# Altium PCB AmplificadorNMOS.PcbDoc
Units mm, origin at the board's own origin, x right, y up, seen from the top; angles counter-clockwise.
Board outline 100 x 100 mm, 2 copper layers (Top Layer, Bottom Layer); 21 components, 9 nets, 40 pads, 0 vias.
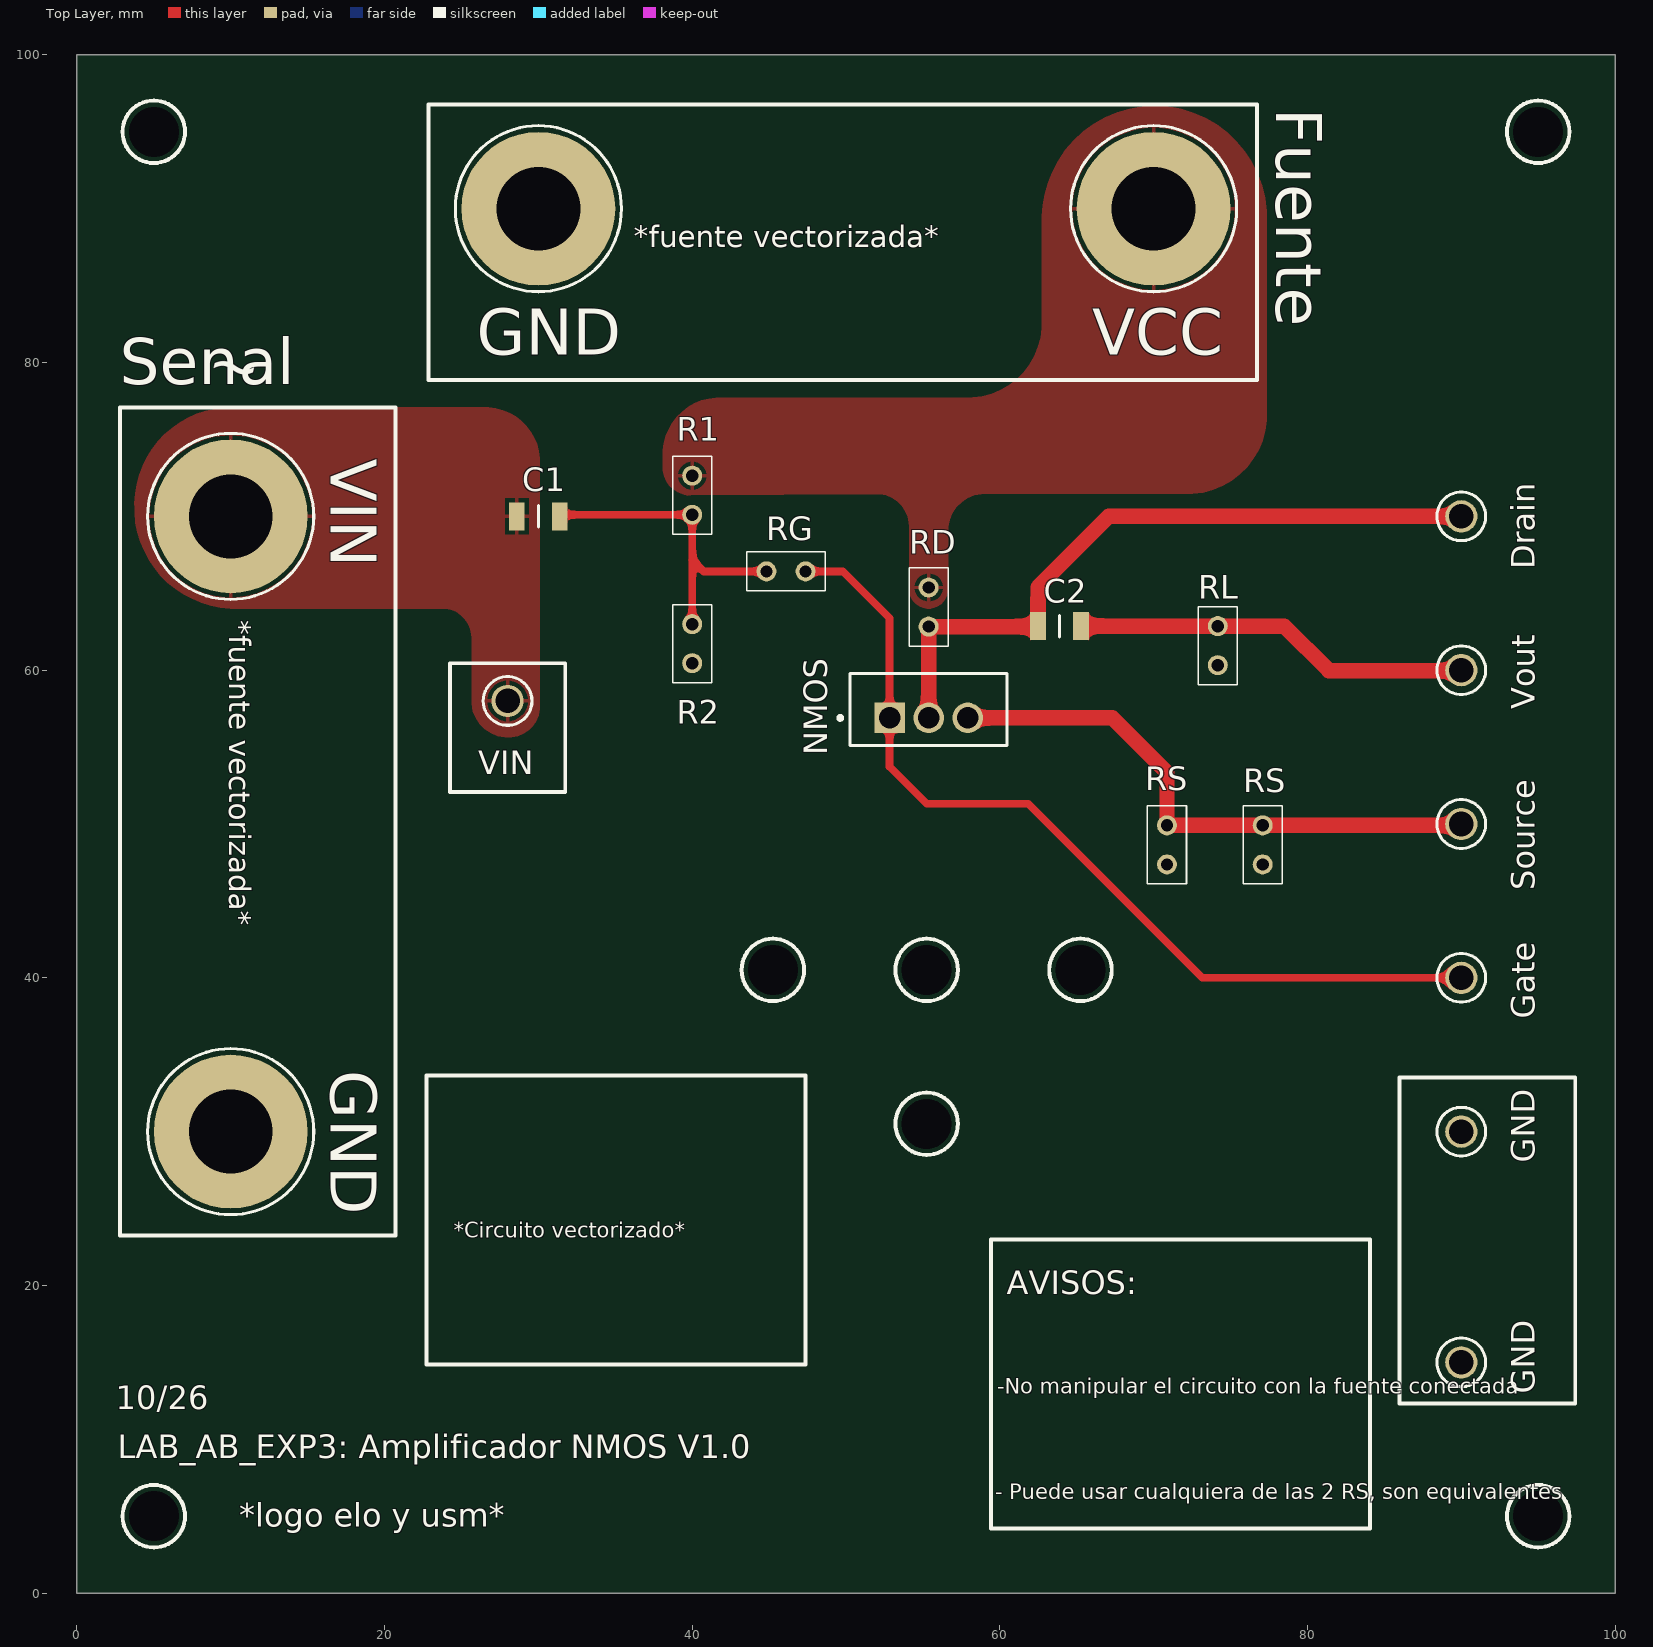
[diagram p0: Top Layer view]
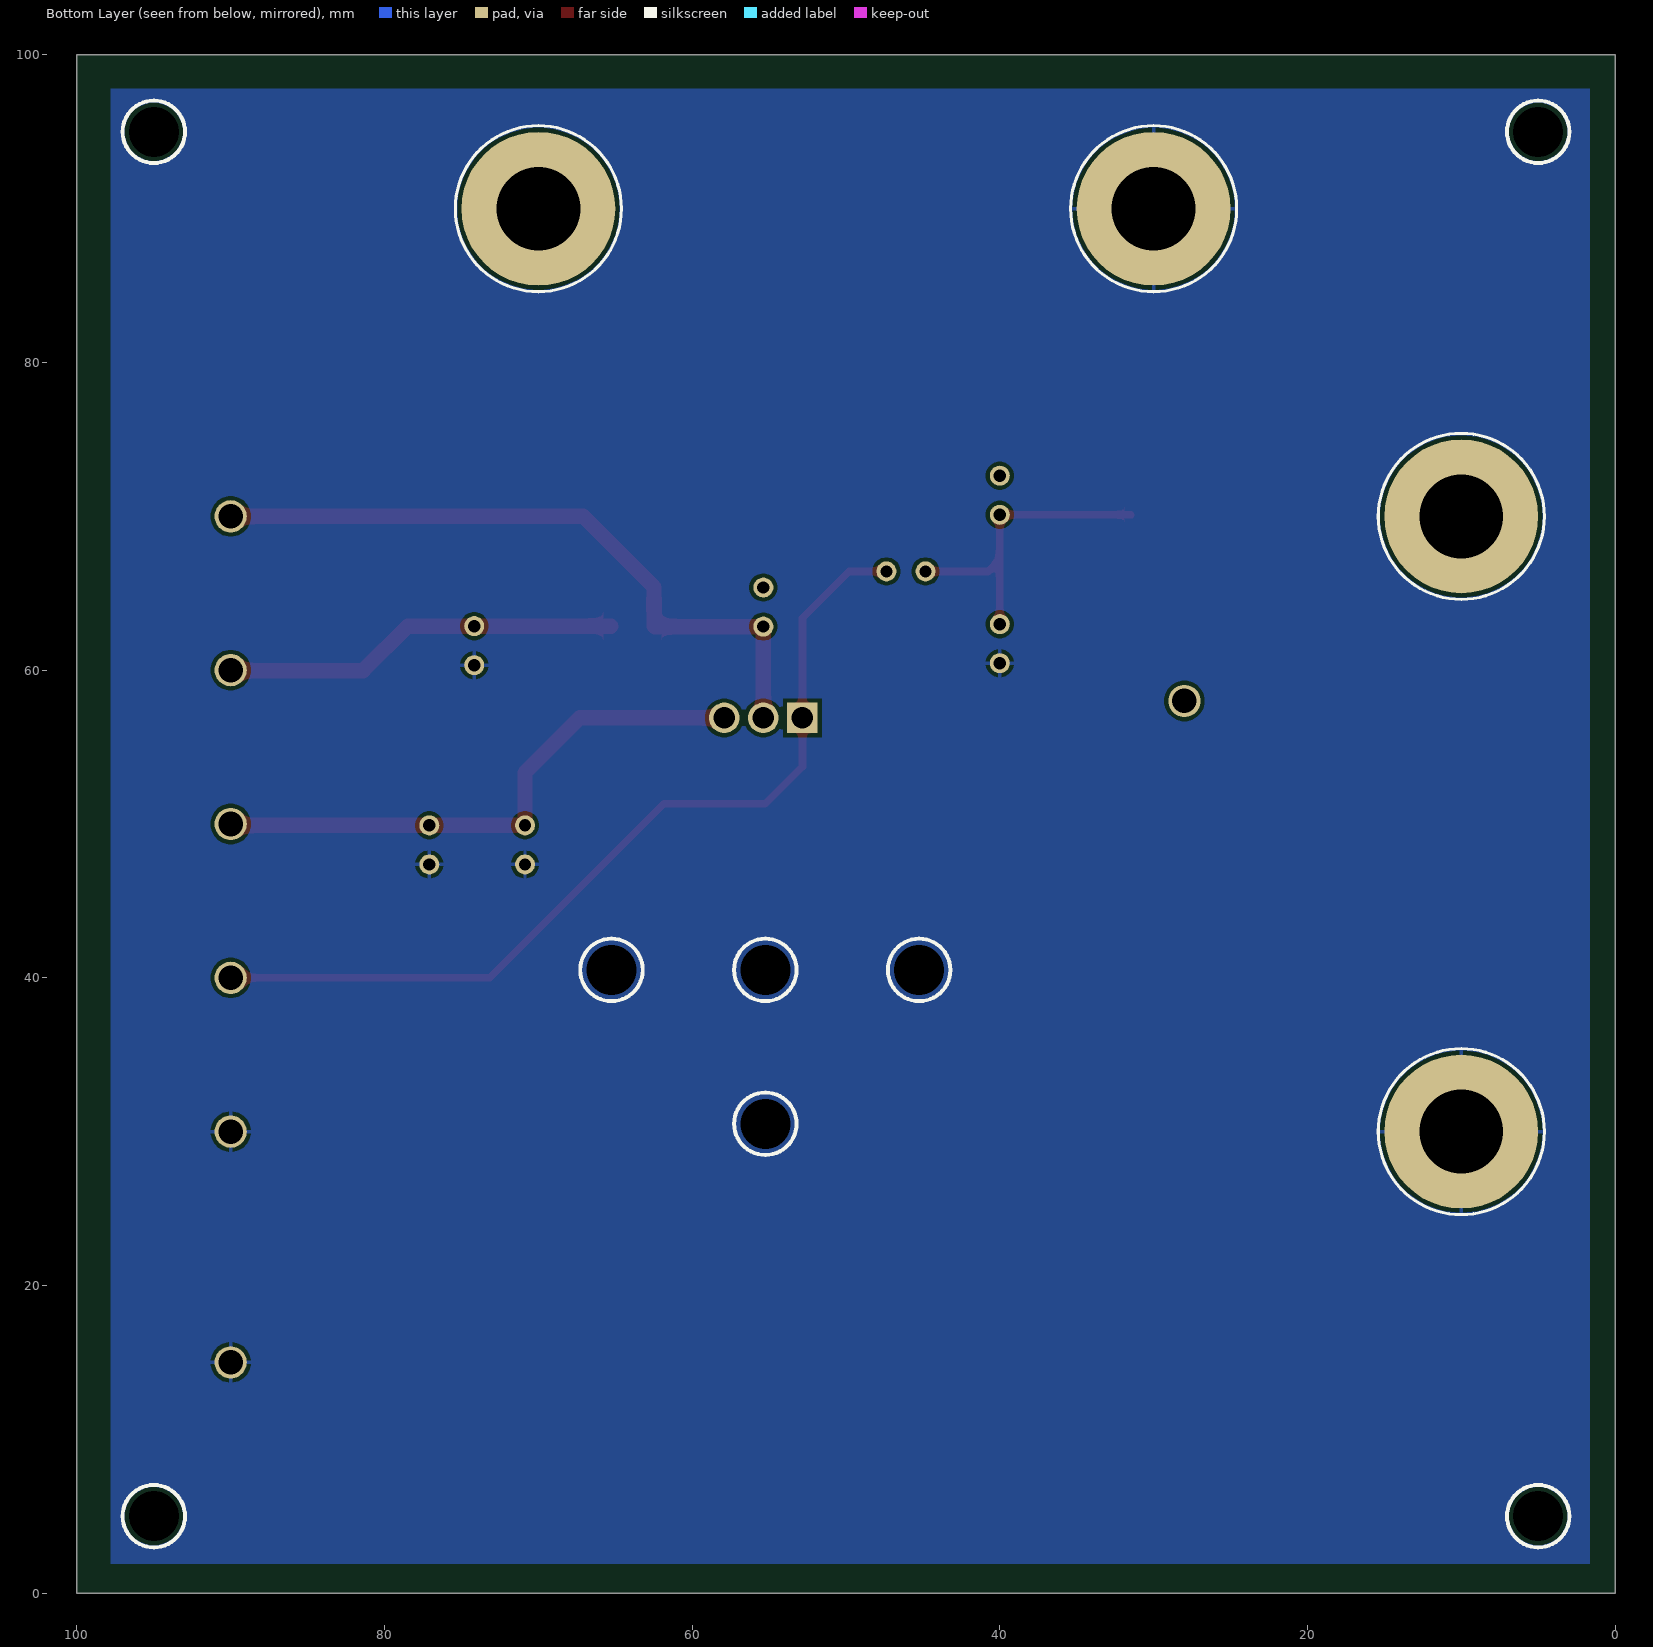
[diagram p1: Bottom Layer view, seen from below]
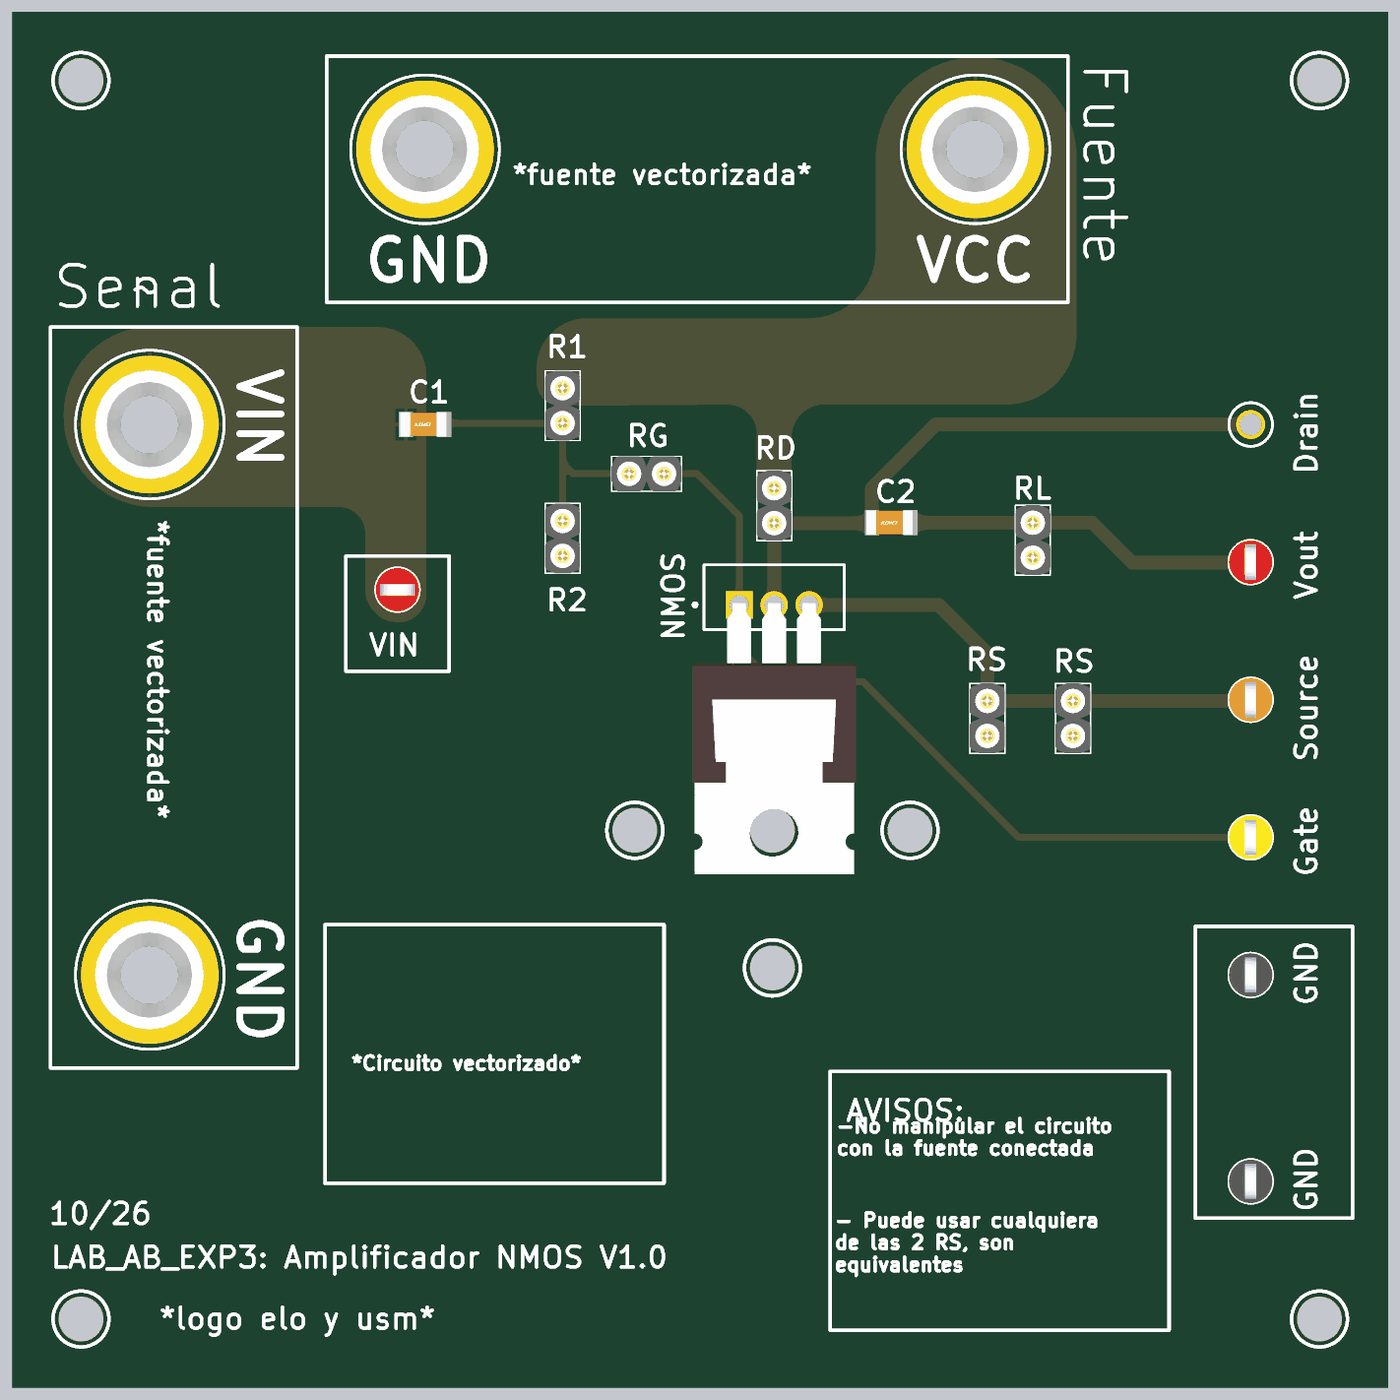
[diagram p2: 3D render of the assembled board from above, using the file's embedded part models]

## Layer stack, top to bottom
Top Solder: solder mask 0.0102, Solder Resist, Dk 3.5
Top Layer: signal copper 0.0356
Dielectric 1: dielectric 0.32, FR-4, Dk 4.8
Bottom Layer: signal copper 0.0356
Bottom Solder: solder mask 0.0102, Solder Resist, Dk 3.5

## Board outline
0,0 100,0 100,100 0,100

## Design rules (kind name [scope] priority, off if disabled: settings)
Clearance [All] p1: gap=0.254 ignorepadtopadclearanceinfootprint=FALSE
PolygonConnect [All] p1: connectstyle=Relief reliefconductorwidth=0.254 reliefentries=4 polygonreliefangle="90 Angle" airgapwidth=0.254
RoutingVias [All] p1: holewidth=0.711 width=1.27 viastyle="Through Hole" minholewidth=0.711 minwidth=1.27 maxholewidth=0.711 maxwidth=1.27
SolderMaskExpansion [All] p1: expansion=0 istentingtop=FALSE
SupplyNets "Schematic Supply Nets_2" [InNet('+VAC')] p1: voltage=0.000
SupplyNets "Schematic Supply Nets_1" [InNet('GND')] p2: voltage=0.000
SupplyNets "Schematic Supply Nets" [InNet('VCC')] p3: voltage=0.000
Width [All] p1: maxlimit=0.254 minlimit=0.254 preferedwidth=0.254
30 further rules are at their usual default settings.

## Components (designator, comment, footprint, x,y, rotation, side; value= is the part's Value field where it differs from the comment)
C1 "C1206C105K3RAC7800" CAPC3216X140N 30,70 r0 top locked (schematic designator C4)
C2 "C1206C105K3RAC7800" CAPC3216X140N 63.881,62.865 r0 top (schematic designator C5)
Drain "5012" KSTN-5012_V 90,70 r270 top (schematic designator TP33)
Gate "5014" KSTN-5014_V 90,40 r270 top (schematic designator TP34)
GND "5011" KSTN-5011_V 90,30 r270 top locked (schematic designator TP50)
GND "5011" KSTN-5011_V 90,15 r270 top locked (schematic designator TP36)
GND "575-4" KSTN-575-4 30,90 r0 top locked (schematic designator TP30)
GND "575-4" KSTN-575-4 10,30 r0 top locked (schematic designator TP28)
NMOS "IRLZ44N" IFX-PG-TO220-3-904-1 55.372,56.896 r0 top (schematic designator Q2)
R1 "D01-9970242" D019970242 40,72.644 r90 top locked (schematic designator J22)
R2 "D01-9970242" D019970242 40,62.992 r90 top locked (schematic designator J23)
RD "D01-9970242" D019970242 55.372,65.374 r90 top locked (schematic designator J24)
RG "D01-9970242" D019970242 44.831,66.421 r180 top locked (schematic designator J26)
RL "D01-9970242" D019970242 74.168,62.865 r90 top (schematic designator J27)
RS "D01-9970242" D019970242 77.089,49.911 r90 top (schematic designator J31)
RS "D01-9970242" D019970242 70.866,49.911 r90 top (schematic designator J25)
Source "5013" KSTN-5013_V 90,50 r270 top locked (schematic designator TP35)
VCC "575-4" KSTN-575-4 70,90 r0 top locked (schematic designator TP29)
VIN "5010" KSTN-5010_V 28,58 r0 top (schematic designator TP31)
VIN "575-4" KSTN-575-4 10,70 r0 top locked (schematic designator TP27)
Vout "5010" KSTN-5010_V 90,60 r270 top locked (schematic designator TP32)

## Footprints (in the part's own frame and the unit in brackets; to place one, negate y for a bottom-side part, rotate by r counter-clockwise, add the part's x,y. Pads: shape width x height; smd on the part's side, far side on the other; paste and mask are expansions set on the pad)
CAPC3216X140N [mm]
  rect 1.02x1.82 smd: 1(-1.4,0) 2(1.4,0)
  silkscreen extent 0,-0.7 0,0.7, body extent -1.83,-0.89 1.57,0.91, height 1.4
D019970242 [mm]
  round 1.3 hole 0.8: 1(0,0) 2(-2.54,0)
  silkscreen extent -3.81,-1.27 1.27,1.27, body extent -3.81,-1.27 1.27,1.27, height 4.22
IFX-PG-TO220-3-904-1 [mm] "TO,flange mount,2.54 mm pitch, 3 pin, 10.16 mm L X 4.57 mm W X 20.56 mm H body"
  rect 1.99x1.99 hole 1.39 paste-2539.97 mask+0: 1(-2.54,0)
  round 1.99 hole 1.39 paste-2539.97 mask+0: 2(0,0) 3(2.54,0)
  silkscreen extent -5.87,-1.8 5.1,2.9, body extent -5.94,-19.59 5.94,0.25, height 4.41
KSTN-575-4 [mm] "Banana Jack, Non-Insulated, Dia 7.92mm"
  round 10 hole 5.45: 1(0,0)
  silkscreen extent -5.4,-5.4 5.4,5.4, body extent -3.98,-3.96 3.92,3.94, height 2.36
KSTN-5010_V [mm] "Test Point, Dia 3.17mm"
  round 2.1 hole 1.6: 1(0,0)
  silkscreen extent -1.59,-1.58 1.59,1.58, body extent -1.59,-1.59 1.59,1.59, height 8.13
KSTN-5011_V [mm] "Test Point, Dia 3.17mm"
  round 2.1 hole 1.6: 1(0,0)
  silkscreen extent -1.58,-1.59 1.58,1.59, body extent -1.59,-1.59 1.59,1.59, height 8.13
KSTN-5012_V [mm] "Test Point, Dia 3.17mm"
  round 2.1 hole 1.6: 1(0,0)
  silkscreen extent -1.58,-1.59 1.58,1.59, body extent -1.59,-1.59 1.59,1.59, height 8.13
KSTN-5013_V [mm] "Test Point, Dia 3.17mm"
  round 2.1 hole 1.6: 1(0,0)
  silkscreen extent -1.58,-1.59 1.58,1.59, body extent -1.59,-1.59 1.59,1.59, height 8.13
KSTN-5014_V [mm] "Test Point, Dia 3.17mm"
  round 2.1 hole 1.6: 1(0,0)
  silkscreen extent -1.58,-1.59 1.58,1.59, body extent -1.59,-1.59 1.59,1.59, height 8.13

## Part data
C1 C2: "Multilayer Ceramic Capacitors MLCC - SMD/SMT 25V 1uF X7R 1206 10%", Manufacturer_Name="Yageo Group", Mouser Part Number=80-C1206C105K3R7800, Datasheet Link=https://connect.kemet.com:7667/gateway/IntelliData-ComponentDocumentation/1.0/download/specsheet/C1206C105K3RACTU, Geometry.Height=1.4mm, Manufacturer_Part_Number=C1206C105K3RAC7800, Mouser Price/Stock=https://www.mouser.co.uk/ProductDetail/KEMET/C1206C105K3RAC7800?qs=9Bh1%2FLvCqWR5qBTiXKKjKA%3D%3D
Drain: library part CMP-1672-00004-4, "Test Point, White, Through Hole, RoHS, Bulk", Colour=White, Manufacturer=Keystone, Package Quantity=100, ComponentLink1Description="Manufacturer URL", ComponentLink1URL=http://www.keyelco.com/, ComponentLink2Description=Datasheet, ComponentLink2URL=http://www.keyelco.com/product-pdf.cfm?p=1321, Contact Material=Bronze, Contact Plating=Silver, DatasheetVersion="Rev. F, 12/2013", Height="8.12 mm", Length="11.3 mm", Mount="Through Hole", Mounting Technology="Through Hole", PackageDescription="1-Pin Through Hole Device, Dia 3.17 mm", PackageReference=5012, Packaging=Bulk, Pins=1, REACH SVHC="No SVHC", RoHSCompliant=true
Gate: library part CMP-1672-00006-4, "Test Point, Yellow, Through Hole, RoHS, Bulk", Colour=Yellow, Manufacturer=Keystone, Package Quantity=100, ComponentLink1Description="Manufacturer URL", ComponentLink1URL=http://www.keyelco.com/, ComponentLink2Description=Datasheet, ComponentLink2URL=http://www.keyelco.com/product-pdf.cfm?p=1323, Contact Material=Bronze, Contact Plating=Silver, DatasheetVersion="Rev. F, 12/2013", Height="8.12 mm", Mount="Through Hole", Mounting Technology="Through Hole", PackageDescription="1-Pin Through Hole Device, Dia 3.17 mm", PackageReference=5014, Packaging=Bulk, REACH SVHC="No SVHC", RoHSCompliant=true
GND GND: library part CMP-1672-00003-4, "Test Point, Black, Through Hole, RoHS, Bulk", Colour=Black, Manufacturer=Keystone, Package Quantity=100, ComponentLink1Description="Manufacturer URL", ComponentLink1URL=http://www.keyelco.com/, ComponentLink2Description=Datasheet, ComponentLink2URL=http://www.keyelco.com/product-pdf.cfm?p=1320, Contact Material=Bronze, Contact Plating=Silver, DatasheetVersion="Rev. F, 12/2013", Height="8.12 mm", Mount="Through Hole", Mounting Technology="Through Hole", PackageDescription="1-Pin Through Hole Device, Dia 3.17 mm", PackageReference=5011, Packaging=Bulk, Pins=1, REACH SVHC="No SVHC", RoHSCompliant=true
GND GND VCC VIN: library part CMP-2000-05649-1, "Banana Jack, Non-Insulated, 1-Pin THD, RoHS, Bulk", Color=-, Manufacturer=Keystone-Electronics, Package Description="1-Pin Through Hole Device, Dia 7.92 mm", Package Version="Rev. B, 11/1994", Body Material=-, Category=Connectors,Interconnects, Contact Finish=Nickel, Contact Material=Brass, Datasheet URL=http://www.keyelco.com/product-pdf.cfm?p=2379, Datasheet Version="Rev. B, 11/1994", Family=BananaandTipConnectors-Jacks,Plugs, Features=-, Gender=Female, Insulation=Non-Insulated, Manufacturer URL=http://www.keyelco.com/, Mounting Technology=ThroughHole, Mounting Type=ThroughHole, Operating Temperature=-, Package Reference=575-4, Package URL=http://www.keyelco.com/product-pdf.cfm?p=2379, Packaging=Bulk, Plug/Mating Plug Diameter=StandardBanana, Series=-, Termination=Solder, Type=BananaJack, Wire Gauge=-
NMOS: "OptiMOS 3 Power-Transistor, VDS 100V", Manufacturer="Infineon Technologies", Manufacturer Order Number=IRLZ44N, PackageReference=PG-TO220-3-904
R1 R2 RD RG RL RS RS: "IC Socket: 2 Pos Receptacle SIL Straight THT Strip", Manufacturer_Name=Harwin, Mouser Part Number=855-D01-9970242, Datasheet Link=https://content.harwin.com/m/e0b6c35948424a73/original/DRG-00097-Technical-Drawing-Datasheet-D01-997-pdf.pdf, Geometry.Height=4.2mm, Manufacturer_Part_Number=D01-9970242, Mouser Price/Stock=https://www.mouser.co.uk/ProductDetail/Harwin/D01-9970242?qs=TpUtqFO9vU%252Bf37OJ5TYoTQ%3D%3D
Source: library part CMP-1672-00005-4, "Test Point, Orange, Through Hole, RoHS, Bulk", Colour=Orange, Manufacturer=Keystone, Package Quantity=100, ComponentLink1Description="Manufacturer URL", ComponentLink1URL=http://www.keyelco.com/, ComponentLink2Description=Datasheet, ComponentLink2URL=http://www.keyelco.com/product-pdf.cfm?p=1322, Contact Material=Bronze, Contact Plating=Silver, DatasheetVersion="Rev. F, 12/2013", Height="8.12 mm", Mount="Through Hole", Mounting Technology="Through Hole", PackageDescription="1-Pin Through Hole Device, Dia 3.17 mm", PackageReference=5013, Packaging=Bulk, REACH SVHC="No SVHC", RoHSCompliant=True
VIN Vout: library part CMP-1672-00002-4, "Test Point, Red, Through Hole, RoHS, Bulk", Colour=Red, Manufacturer=Keystone, Package Quantity=100, ComponentLink1Description="Manufacturer URL", ComponentLink1URL=http://www.keyelco.com/, ComponentLink2Description=Datasheet, ComponentLink2URL=http://www.keyelco.com/product-pdf.cfm?p=1319, Contact Material=Bronze, Contact Plating=Silver, DatasheetVersion="Rev. F, 12/2013", Height="8.12 mm", Mount="Through Hole", Mounting Technology="Through Hole", PackageDescription="1-Pin Through Hole Device, Dia 3.17 mm", PackageReference=5010, Packaging=Bulk, Pins=1, REACH SVHC="No SVHC", RoHSCompliant=true

## Free pads (board coordinates)
  round 0 hole 3.25: 11(5,5) 11(5,95) 11(45.245,40.513) 11(55.245,30.513) 11(55.245,40.513) 11(65.245,40.513) 11(95,5) 11(95,95)

## Nets (pads, with @x,y where several pads share a name; then routed paths per layer and width w, separated by ;. In a path a pad name is that pad's centre, name@x,y a point inside that pad or via, vN(x,y) a via of type N, cw(c..) or ccw(c..) an arc to the next point about the centre after c; other vN are vias at no path point)
+VAC: C1.1 VIN.1
Center: C1.2 R1.2 R2.1 RG.1 | length 20.9
  Top Layer w0.254: C1.2 C1.2@31.504,70.104
  Top Layer w0.5: C1.2@31.504,70.104 R1.2 40,67.183 ; R2.1 40,67.183 ; RG.1 40.762,66.421 40,67.183
Drain: C2.1 Drain.1 NMOS.2 RD.2 | length 45
  Top Layer w1: NMOS.2 RD.2 C2.1@62.45,62.834 ; C2.1 62.481,65.402 67.079,70 Drain.1
Gate: Gate.1 NMOS.1 RG.2 | length 59.2
  Top Layer w0.5: RG.2 49.784,66.421 52.832,63.373 NMOS.1 52.832,53.721 55.245,51.308 61.849,51.308 73.157,40 Gate.1
GND: GND.1 pad.11@45.245,40.513 pad.11@55.245,30.513 pad.11@55.245,40.513 pad.11@65.245,40.513 R2.2 RL.2 RS.2
NetC2_1: 
Out: C2.2 RL.1 Vout.1 | length 25.9
  Top Layer w0.254: Vout.1@89.966,59.966 Vout.1
  Top Layer w1: C2.2 RL.1 78.486,62.865 81.385,59.966 Vout.1@89.966,59.966
Source: NMOS.3 RS.1 Source.1 | length 37
  Top Layer w1: NMOS.3 67.31,56.896 70.866,53.34 70.866,49.911 77.089,49.911 Source.1@90,49.911
VCC: R1.1 RD.1 VCC.1

## Polygon pours and split planes (outlines as drawn)
VCC on Top Layer "VCC_L01_P001" (solid, pour order 1): 39.9,71.357 51.993,71.444 cw(c52.008,69.35) 54.102,69.35 54.102,65.278 ccw(c55.372,65.278) 55.372,64.008 ccw(c55.372,65.278) 56.642,65.278 56.642,69.088 cw(c59.013,69.088) 59.013,71.459 72.221,71.459 ccw(c72.221,76.581) 77.343,76.581 77.343,89.408 ccw(c70.064,89.408) 63.25,91.97 ccw(c70.739,89.154) 62.738,89.154 62.738,82.55 cw(c57.912,82.55) 57.912,77.724 41.783,77.724 ccw(c41.783,74.041) 38.1,74.041 38.1,73.144 ccw(c39.887,73.144)
+VAC on Top Layer "+VAC_L01_P000" (solid, pour order 0): 10.287,64.008 23.749,64.008 cw(c23.749,62.103) 25.654,62.103 25.654,58.039 ccw(c28.067,58.039) 28.067,55.626 ccw(c28.067,57.658) 30.099,57.658 30.099,73.533 ccw(c26.543,73.533) 26.543,77.089 9.906,77.089 ccw(c10.096,70.739) 3.746,70.548 ccw(c10.287,70.548)
GND on Bottom Layer "GND_L02_P002" (solid, pour order 2): 97.79,97.79 97.79,1.905 1.651,1.905 1.651,97.79

## Silkscreen, mask and mechanical layers (free items; w line width, h text height)
Top Overlay:
  circle w0.254: c45.245,40.513 r2.031
  circle w0.254: c55.245,40.513 r2.031
  circle w0.254: c65.245,40.513 r2.031
  circle w0.254: c55.245,30.513 r2.031
  circle w0.254: c5,5 r2.031
  circle w0.254: c95,5 r2.031
  circle w0.254: c95,95 r2.031
  circle w0.254: c5,95 r2.031
  lines w0.254: 2.794,23.241 20.701,23.241 20.701,77.089 2.794,77.089 2.794,23.241 ; 22.733,14.859 47.371,14.859 47.371,33.655 22.733,33.655 22.733,14.859 ; 22.86,78.867 22.86,96.774 76.708,96.774 76.708,78.867 22.86,78.867 ; 24.257,52.07 31.75,52.07 31.75,60.452 24.257,60.452 24.257,52.07 ; 59.436,4.191 84.074,4.191 84.074,22.987 59.436,22.987 59.436,4.191 ; 85.979,12.319 97.409,12.319 97.409,33.528 85.979,33.528 85.979,12.319
  text "Fuente" at 77.962,96.52 h3 r270
  text "*fuente vectorizada*" at 36.195,87.503 h1.4
  text "~" at 8.232,78.784 h3 r346.5
  text "Senal" at 2.794,78.597 h3
  text "*fuente vectorizada*" at 9.906,63.246 h1.4 r270
  text "*Circuito vectorizado*" at 24.511,23.114 h1
  text "AVISOS:" at 60.452,19.431 h1.52
  text "-No manipular el circuito con la fuente conectada" at 59.817,12.954 h1
  text "10/26" at 2.54,11.938 h1.52
  text "LAB_AB_EXP3: Amplificador NMOS V1.0" at 2.667,8.763 h1.52
  text "- Puede usar cualquiera de las 2 RS, son equivalentes" at 59.69,6.096 h1
  text "*logo elo y usm*" at 10.541,4.318 h1.52
Bottom Overlay:
  circle w0.254: c55.245,40.513 r2.031
  circle w0.254: c45.245,40.513 r2.031
  circle w0.254: c55.245,30.513 r2.031
  circle w0.254: c65.245,40.513 r2.031
  circle w0.254: c5,5 r2.031
  circle w0.254: c95,5 r2.031
  circle w0.254: c95,95 r2.031
  circle w0.254: c5,95 r2.031